# Altium PCB STM_SPI_Module.PcbDoc
Units mil, origin at the board's own origin, x right, y up, seen from the top; angles counter-clockwise.
Board outline 6000 x 4000 mil, 2 copper layers (Top Layer, Bottom Layer); 44 components, 76 nets, 295 pads, 0 vias.
Unrouted connection lines stored in the file: 101.
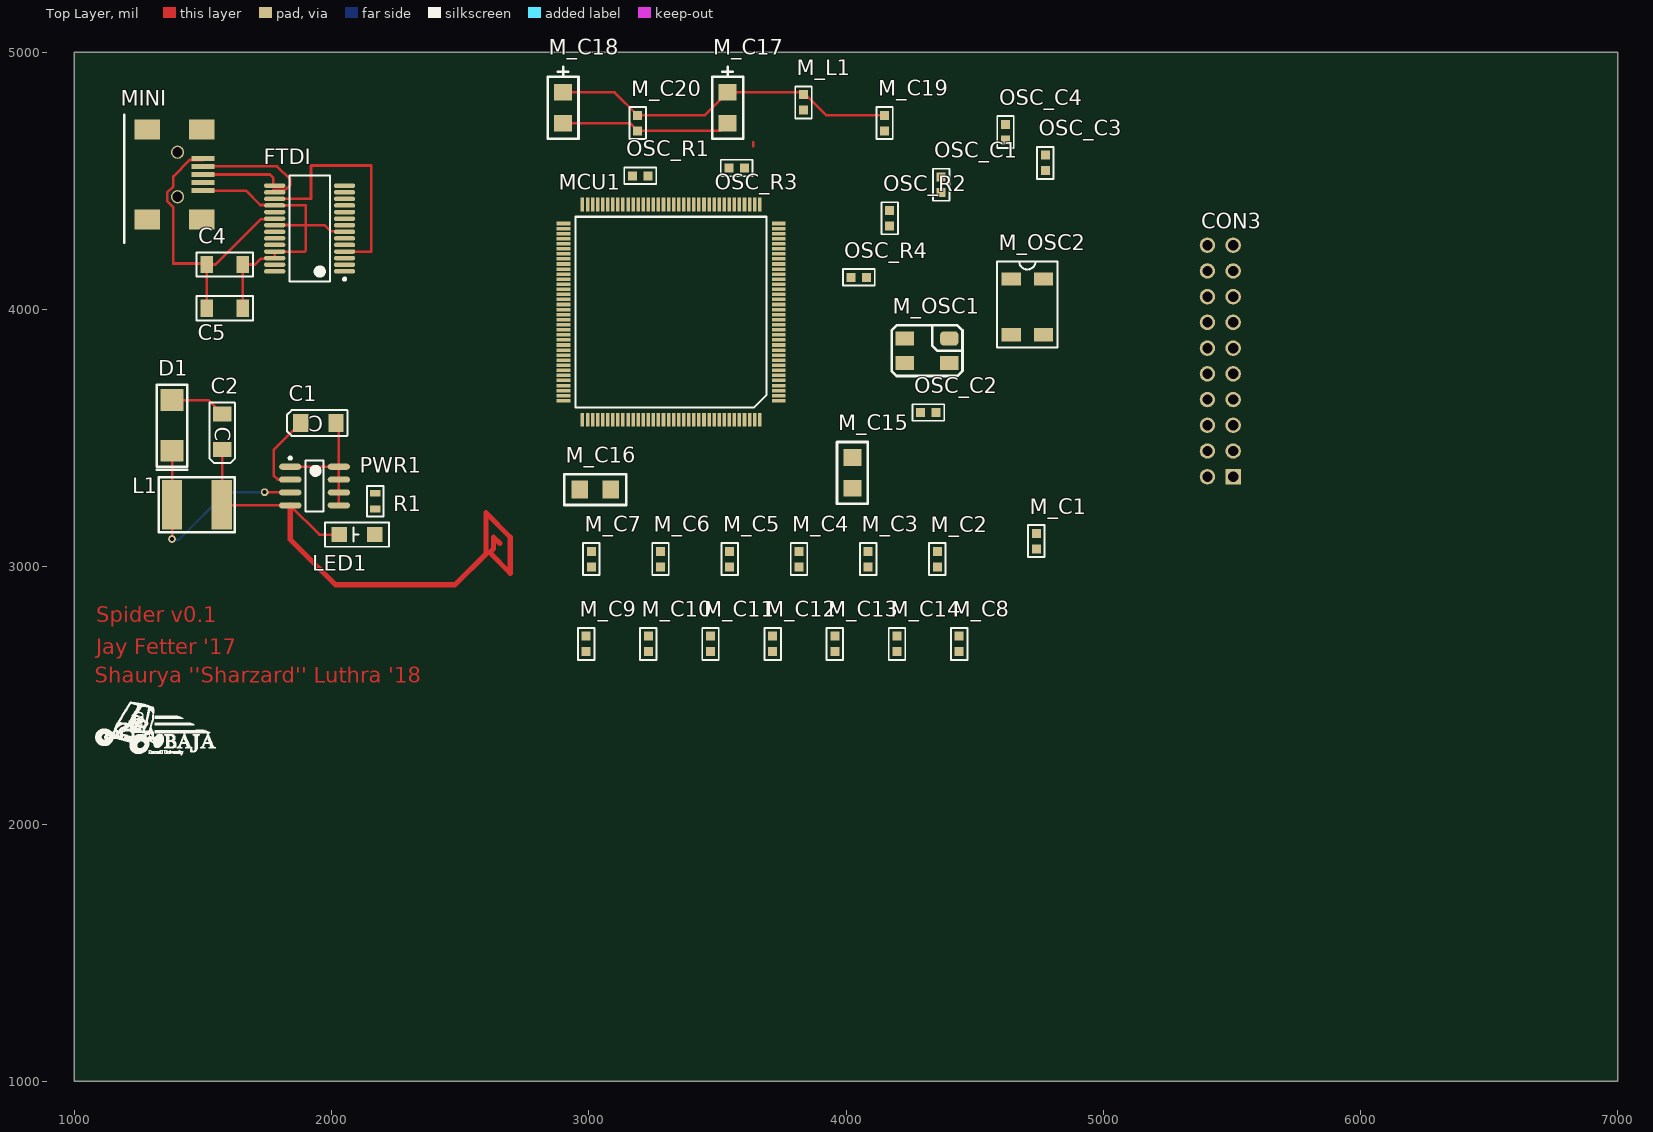
[diagram p0: Top Layer view]
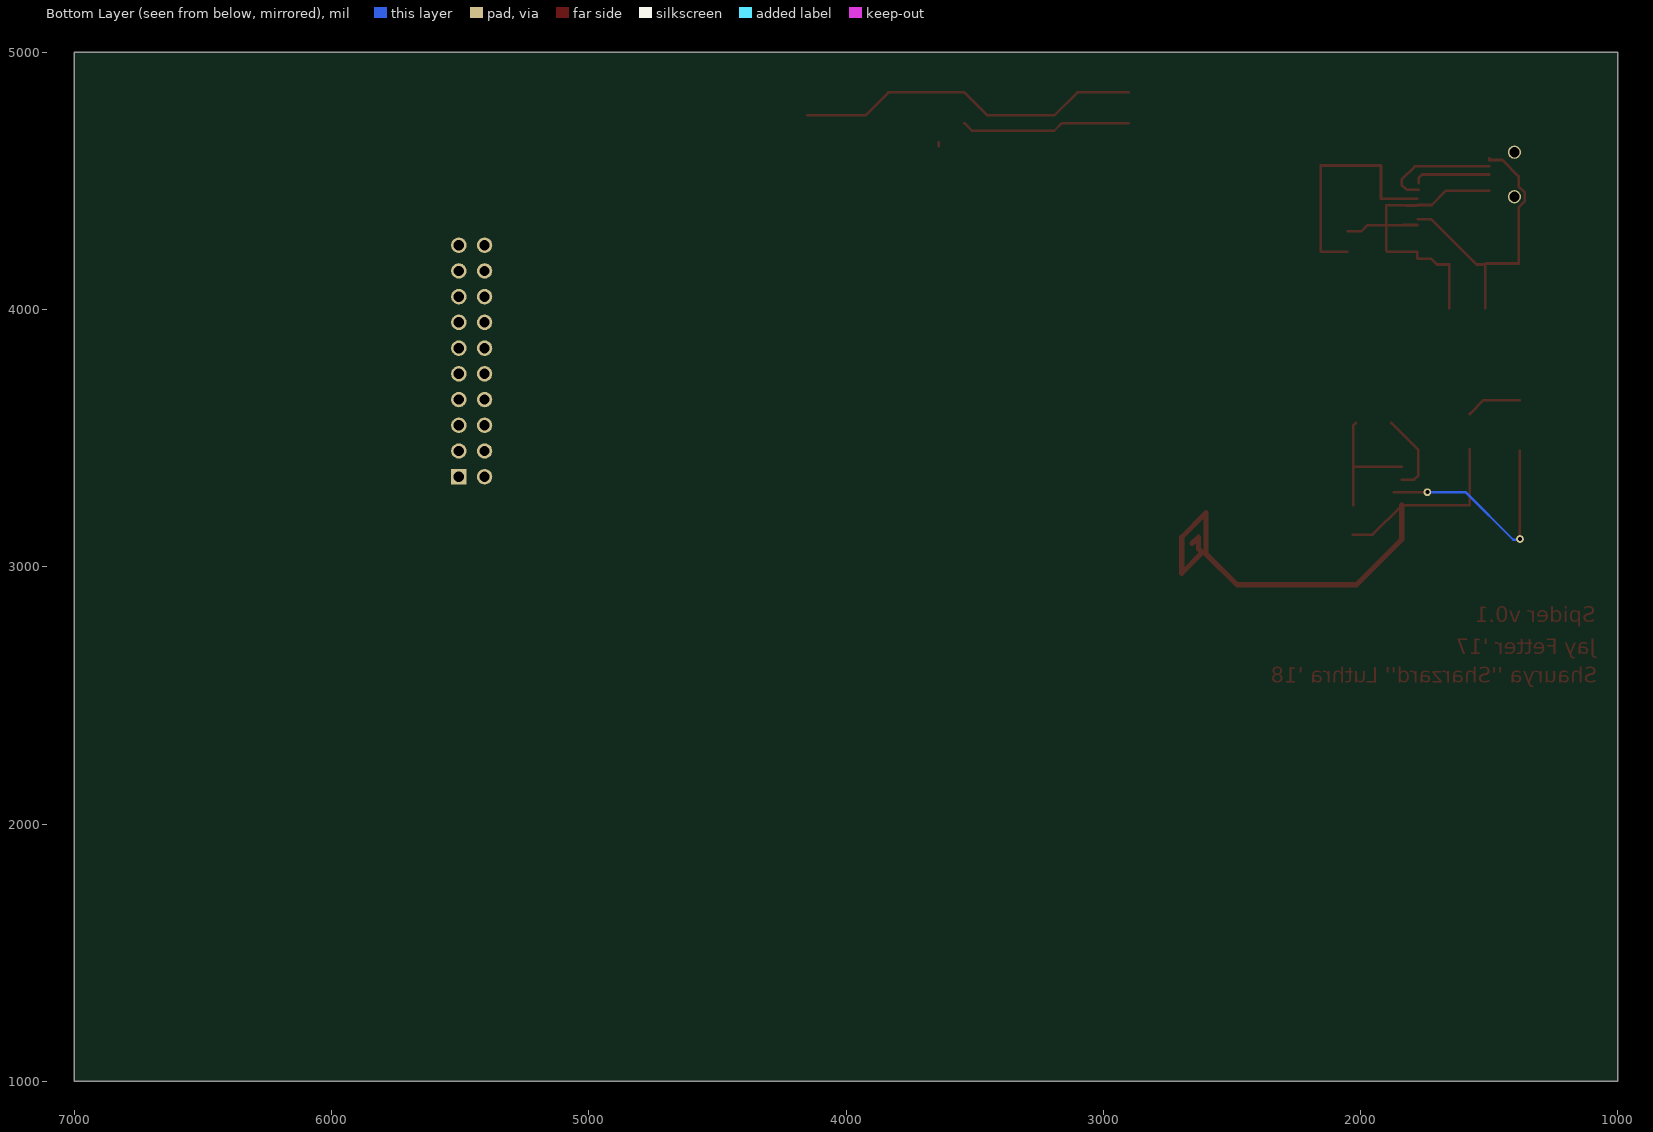
[diagram p1: Bottom Layer view, seen from below]

## Layer stack, top to bottom
Top Solder: solder mask 0.4, Solder Resist, Dk 3.5
Top Layer: signal copper 1.4
Dielectric1: dielectric 12.6, FR-4, Dk 4.8
Bottom Layer: signal copper 1.4
Bottom Solder: solder mask 0.4, Solder Resist, Dk 3.5

## Board outline
1000,1000 7000,1000 7000,5000 1000,5000

## Design rules (kind name [scope] priority, off if disabled: settings)
Clearance [All] p1: gap=10
PolygonConnect [All] p1: connectstyle=Relief reliefconductorwidth=10 reliefentries=4 polygonreliefangle="90 Angle" airgapwidth=10
RoomDefinition U_FTDI [InComponentClass('U_FTDI')] p1: confinementstyle=ConfineIn formatcopy=TRUE lockcomponents=FALSE outline 1140.83,3820 2440,3820 2440,4920 1140.83,4920
RoomDefinition Power_Supplies [InComponentClass('Power_Supplies')] p2: confinementstyle=ConfineIn formatcopy=TRUE lockcomponents=FALSE outline 1148.9,3008.9 2498.9,3008.9 2498.9,3718.9 1148.9,3718.9
RoutingVias [All] p1: holewidth=28 width=50 viastyle="Through Hole" minholewidth=28 minwidth=50 maxholewidth=28 maxwidth=50
SilkToSolderMaskClearance SilkscreenOverComponentPads [IsPad] p1: minsilkscreentomaskgap=10 clearancetoexposedcopper=TRUE
SolderMaskExpansion [All] p1: expansion=4
UnpouredPolygon [All] p1: allowunpoured=FALSE
Width [All] p1: maxlimit=20 minlimit=10 preferedwidth=10
28 further rules are at their usual default settings.

## Classes and differential pairs
component class U_FTDI: C4 C5 FTDI MINI
net class MUX[0..3]: MUX0 MUX1 MUX2 MUX3
net class DAT[0..3]: DAT0 DAT1 DAT2 DAT3
net class D[0..9]: D0 D1 D2 D3 D4 D5 D6 D7 D8 D9
component class U_SPI_Module: CON3 M_C1 M_C2 M_C3 M_C4 M_C5 M_C6 M_C7 M_C8 M_C9 M_C10 M_C11 M_C12 M_C13 M_C14 M_C15 M_C16 M_C17 M_C18 M_C19 M_C20 M_L1 M_OSC1 M_OSC2 MCU1 OSC_C1 OSC_C2 OSC_C3 OSC_C4 OSC_R1 OSC_R2 OSC_R3 OSC_R4
component class Power_Supplies: C1 C2 D1 L1 LED1 PWR1 R1

## Components (designator, comment, footprint, x,y, rotation, side; value= is the part's Value field where it differs from the comment)
C1 "15 uF Tantalum Capacitor" "1206 (POLAR)" 1948.9,3558.9 r180 top
C2 "220 uF Tantalum Capacitor" "1206 (POLAR)" 1575,3525 r270 top
C4 ".1uF Surface Mount Cap 1206" "Surface Mount Capacitor 1206" 1585,4175 r0 top
C5 "1uF" 1206 1585,4005 r0 top
CON3 "PRGM" JTAG/SWO-20PIN 5455,3800 r90 top
D1 "B260A Flyback Diode" DO-214AC 1345,3400 r90 top
FTDI "FTDI FT232R" "FTDI FT232R" 1915,4315 r180 top
L1 "ASPI-6045S" ASPI-6045 1380,3245 r90 top
LED1 "Green LED 1206" "Cathode Mark 1206 led footprint" 2030,3125 r0 top
M_C1 "Cap" SMD0603 4740,3100 r270 top
M_C2 "Cap" SMD0603 4355,3030 r270 top
M_C3 "Cap" SMD0603 4086,3030 r90 top
M_C4 "Cap" SMD0603 3817,3030 r90 top
M_C5 "Cap" SMD0603 3548,3030 r90 top
M_C6 "Cap" SMD0603 3279,3030 r90 top
M_C7 "Cap" SMD0603 3010,3030 r90 top
M_C8 "Cap" SMD0603 4440,2700 r270 top
M_C9 "Cap" SMD0603 2990,2700 r270 top
M_C10 "Cap" SMD0603 3231.67,2700 r270 top
M_C11 "Cap" SMD0603 3473.33,2700 r270 top
M_C12 "Cap" SMD0603 3715,2700 r270 top
M_C13 "Cap" SMD0603 3956.67,2700 r270 top
M_C14 "Cap" SMD0603 4198.33,2700 r270 top
M_C15 "Cap" SMD1206 4025,3365 r90 top
M_C16 "Cap" SMD1206 3025,3300 r180 top
M_C17 "Cap" "SMD1206 Polarized" 3539.75,4784.5 r270 top
M_C18 "Cap" "SMD1206 Polarized" 2900,4784.5 r270 top
M_C19 "Cap" SMD0603 4150,4725 r90 top
M_C20 "Cap" SMD0603 3190.38,4725 r270 top
M_L1 "BEAD" SMD0603 3835,4805 r90 top
M_OSC1 "8MHz Oscillator" ABMM2-OSC 4315,3840 r180 top
M_OSC2 "32.768KHz Oscillator" MC-306-OSC 4705,4010 r270 top
MCU1 "STM32F429ZIT6U" LQPF144 3320,3990 r180 top
MINI "Mini USB B" "Mini USB B" 1500,4587.95 r0 top
OSC_C1 "Cap" SMD0603 4370,4485 r270 top
OSC_C2 "Cap" SMD0603 4320,3600 r180 top
OSC_C3 "Cap" SMD0603 4775,4570 r270 top
OSC_C4 "Cap" SMD0603 4620,4690 r270 top
OSC_R1 "Res" SMD0603 3200,4520 r180 top
OSC_R2 "Res" SMD0603 4170,4355 r90 top
OSC_R3 "Res" SMD0603 3575,4550 r180 top
OSC_R4 "Res" SMD0603 4050,4125 r180 top
PWR1 "MIC4680" TJA1040 1933.9,3313.9 r0 top
R1 "0603 Res" "0603/1608 SMD Resistor" 2170,3255 r270 top

## Footprints (in the part's own frame and the unit in brackets; to place one, negate y for a bottom-side part, rotate by r counter-clockwise, add the part's x,y. Pads: shape width x height; smd on the part's side, far side on the other; paste and mask are expansions set on the pad)
"0603/1608 SMD Resistor" [mm]
  rect 0.65x1 smd: 1(0.775,0) 2(-0.775,0)
  silkscreen extent -1.5,-0.8 1.5,0.8, body extent -0.8,-0.5 0.8,0.5, height 1.2
1206 [mm]
  rect 1.25x1.7 smd: 1(-1.775,0) 2(1.775,0)
  silkscreen extent -2.8,-1.2 2.8,1.2, body extent -1.6,-0.8 1.6,0.8, height 1.2
"1206 (POLAR)" [mm]
  rect 1.5x1.8 smd: 1(1.75,0) 2(-1.75,0)
  silkscreen extent -2.87,-1.27 3.1,1.27, body extent -1.6,-0.9 1.6,0.9, height 1.2
ABMM2-OSC [mm]
  rrect50% 1.8x1.4 smd: 1(-2.2,-1.2)
  rect 1.8x1.4 smd: 2(2.2,-1.2) 3(2.2,1.2) 4(-2.2,1.2)
  silkscreen extent -3.5,-2.5 3.5,2.5
ASPI-6045 [mm]
  rect 4.9x2 smd: 1(-0.1,0) 2(-0.1,-4.9)
  silkscreen extent -2.8,-6.2 2.6,1.3, body extent -2.5,-5.5 2.3,0.5, height 4.5
"Cathode Mark 1206 led footprint" [mm] "OSRAM semiconductor"
  rect 1.5x1.5 smd: +(0,0) -(3.5,0)
  silkscreen extent -1.4,-1.2 4.9,1.2, body extent 0,-0.7 3.6,0.7, height 1
DO-214AC [mm]
  rect 2.16x2.26 smd: 1(1.3,-0.9) 2(6.3,-0.9)
  silkscreen extent -0.6,-2.4 7.8,0.6
"FTDI FT232R" [mm] "SOP, 28-Leads, Body 10.5x5.6mm (max), Pitch 0.65mm, IPC Medium Density"
  oval 2.1x0.45 smd: 1(-3.45,4.225) 2(-3.45,3.575) 3(-3.45,2.925) 4(-3.45,2.275) 5(-3.45,1.625) 6(-3.45,0.975) 7(-3.45,0.325) 8(-3.45,-0.325) 9(-3.45,-0.975) 10(-3.45,-1.625) 11(-3.45,-2.275) 12(-3.45,-2.925) 13(-3.45,-3.575) 14(-3.45,-4.225) 15(3.45,-4.225) 16(3.45,-3.575) 17(3.45,-2.925) 18(3.45,-2.275) 19(3.45,-1.625) 20(3.45,-0.975) 21(3.45,-0.325) 22(3.45,0.325) 23(3.45,0.975) 24(3.45,1.625) 25(3.45,2.275) 26(3.45,2.925) 27(3.45,3.575) 28(3.45,4.225)
  silkscreen extent -3.58,-5.25 2,5.25, body extent -2.8,-5.25 2.8,5.25, height 2
JTAG/SWO-20PIN [mil]
  rect 60x60 hole 40: 1(-450,-50)
  round 60 hole 40: 2(-450,50) 3(-350,-50) 4(-350,50) 5(-250,-50) 6(-250,50) 7(-150,-50) 8(-150,50) 9(-50,-50) 10(-50,50) 11(50,-50) 12(50,50) 13(150,-50) 14(150,50) 15(250,-50) 16(250,50) 17(350,-50) 18(350,50) 19(450,-50) 20(450,50)
LQPF144 [mm]
  rect 0.35x1.35 smd mask+0.025: 1(-8.75,-10.625) 2(-8.25,-10.625) 3(-7.75,-10.625) 4(-7.25,-10.625) 5(-6.75,-10.625) 6(-6.25,-10.625) 7(-5.75,-10.625) 8(-5.25,-10.625) 9(-4.75,-10.625) 10(-4.25,-10.625) 11(-3.75,-10.625) 12(-3.25,-10.625) 13(-2.75,-10.625) 14(-2.25,-10.625) 15(-1.75,-10.625) 16(-1.25,-10.625) 17(-0.75,-10.625) 18(-0.25,-10.625) 19(0.25,-10.625) 20(0.75,-10.625) 21(1.25,-10.625) 22(1.75,-10.625) 23(2.25,-10.625) 24(2.75,-10.625) 25(3.25,-10.625) 26(3.75,-10.625) 27(4.25,-10.625) 28(4.75,-10.625) 29(5.25,-10.625) 30(5.75,-10.625) 31(6.25,-10.625) 32(6.75,-10.625) 33(7.25,-10.625) 34(7.75,-10.625) 35(8.25,-10.625) 36(8.75,-10.625) 73(8.75,10.625) 74(8.25,10.625) 75(7.75,10.625) 76(7.25,10.625) 77(6.75,10.625) 78(6.25,10.625) 79(5.75,10.625) 80(5.25,10.625) 81(4.75,10.625) 82(4.25,10.625) 83(3.75,10.625) 84(3.25,10.625) 85(2.75,10.625) 86(2.25,10.625) 87(1.75,10.625) 88(1.25,10.625) 89(0.75,10.625) 90(0.25,10.625) 91(-0.25,10.625) 92(-0.75,10.625) 93(-1.25,10.625) 94(-1.75,10.625) 95(-2.25,10.625) 96(-2.75,10.625) 97(-3.25,10.625) 98(-3.75,10.625) 99(-4.25,10.625) 100(-4.75,10.625) 101(-5.25,10.625) 102(-5.75,10.625) 103(-6.25,10.625) 104(-6.75,10.625) 105(-7.25,10.625) 106(-7.75,10.625) 107(-8.25,10.625) 108(-8.75,10.625)
  rect 1.35x0.35 smd mask+0.025: 37(10.625,-8.75) 38(10.625,-8.25) 39(10.625,-7.75) 40(10.625,-7.25) 41(10.625,-6.75) 42(10.625,-6.25) 43(10.625,-5.75) 44(10.625,-5.25) 45(10.625,-4.75) 46(10.625,-4.25) 47(10.625,-3.75) 48(10.625,-3.25) 49(10.625,-2.75) 50(10.625,-2.25) 51(10.625,-1.75) 52(10.625,-1.25) 53(10.625,-0.75) 54(10.625,-0.25) 55(10.625,0.25) 56(10.625,0.75) 57(10.625,1.25) 58(10.625,1.75) 59(10.625,2.25) 60(10.625,2.75) 61(10.625,3.25) 62(10.625,3.75) 63(10.625,4.25) 64(10.625,4.75) 65(10.625,5.25) 66(10.625,5.75) 67(10.625,6.25) 68(10.625,6.75) 69(10.625,7.25) 70(10.625,7.75) 71(10.625,8.25) 72(10.625,8.75) 109(-10.625,8.75) 110(-10.625,8.25) 111(-10.625,7.75) 112(-10.625,7.25) 113(-10.625,6.75) 114(-10.625,6.25) 115(-10.625,5.75) 116(-10.625,5.25) 117(-10.625,4.75) 118(-10.625,4.25) 119(-10.625,3.75) 120(-10.625,3.25) 121(-10.625,2.75) 122(-10.625,2.25) 123(-10.625,1.75) 124(-10.625,1.25) 125(-10.625,0.75) 126(-10.625,0.25) 127(-10.625,-0.25) 128(-10.625,-0.75) 129(-10.625,-1.25) 130(-10.625,-1.75) 131(-10.625,-2.25) 132(-10.625,-2.75) 133(-10.625,-3.25) 134(-10.625,-3.75) 135(-10.625,-4.25) 136(-10.625,-4.75) 137(-10.625,-5.25) 138(-10.625,-5.75) 139(-10.625,-6.25) 140(-10.625,-6.75) 141(-10.625,-7.25) 142(-10.625,-7.75) 143(-10.625,-8.25) 144(-10.625,-8.75)
  silkscreen extent -9.41,-9.41 9.41,9.41
MC-306-OSC [mm]
  rect 1.3x1.9 smd: 1(-2.75,-1.6) 2(2.75,-1.6) 3(2.75,1.6) 4(-2.75,1.6)
  silkscreen extent -4.5,-3 4,3
"Mini USB B" [mm]
  rect 2.3x0.5 smd: 1(0,0) 2(0,-0.8) 3(0,-1.6) 4(0,-2.4) 5(0,-3.2)
  rect 2.5x2 smd: 6(-5.5,-6.05) 6(-5.5,2.85) 6(-0.1,-6.05) 6(-0.1,2.85)
  round 1.3 hole 1: ""(-2.5,-3.8) ""(-2.5,0.6)
  silkscreen extent -7.75,-8.35 -7.75,4.3, body extent -8.37,-6.6 0.83,3.3, height 4.14
SMD0603 [mil]
  rect 35x35 smd: 1(-30,0) 2(30,0)
  silkscreen extent -62,-32 62,32, body extent -31,-16 32,16, height 18
SMD1206 [mil]
  rect 65x70 smd: 1(-60,0) 2(60,0)
  silkscreen extent -120,-60 120,60, body extent -61,-30 61,31, height 22
"SMD1206 Polarized" [mil]
  rect 65x70 smd: 1(-60,0) 2(60,0)
  silkscreen extent -160,-60 120,60, body extent -61,-30 61,31, height 22
"Surface Mount Capacitor 1206" [mm]
  rect 1.25x1.7 smd: 1(-1.775,0) 2(1.775,0)
  silkscreen extent -2.8,-1.2 2.8,1.2, body extent -1.6,-0.8 1.6,0.8, height 1.2
TJA1040 [mm] "SOIC, 8-Leads, Body 5.0x4.0mm (max), Pitch 1.27mm, IPC Medium Density"
  oval 2.2x0.6 smd: 1(-2.4,1.905) 2(-2.4,0.635) 3(-2.4,-0.635) 4(-2.4,-1.905) 5(2.4,-1.905) 6(2.4,-0.635) 7(2.4,0.635) 8(2.4,1.905)
  silkscreen extent -2.52,-2.5 0.9,2.88, body extent -2,-2.5 2,2.5, height 1.75

## Part data
C1: "1206 Surface Mount Capacitor"
C2: library part "15 uF Tantalum Capacitor", "1206 Surface Mount Capacitor"
C4: library part ".1 uF Surface Mount Cap 1206", ".1 uF decoupling caps.  you probably want this for your project"
C5: library part "1206 CAP", ".1 uF decoupling caps.  you probably want this for your project"
CON3: library part JTAG/SWO-20PIN
L1: "68 uH 1.2A surface mount inductor"
LED1: library part "1206 Green LED", "Green surface mount LED"
M_C1 M_C2 M_C3 M_C4 M_C5 M_C6 M_C7 M_C8 M_C9 M_C10 M_C11 M_C12 M_C13 M_C14 M_C15 M_C16 M_C19 M_C20 OSC_C1 OSC_C2 OSC_C3 OSC_C4: library part "Capacitor Ceramic", "Ceramic Chip Capacitor"
M_C17 M_C18: library part "Capacitor Polarized", "Polarized Capacitor (Surface Mount)"
M_L1: library part "Chip Ferrite Bead", "Ferrite Bead"
M_OSC1: library part ABMM2-8.000MHZ-E2-T
M_OSC2: library part "MC-306 32.768K-E3", "32.7680kHz Oscillator"
OSC_R1 OSC_R2 OSC_R3 OSC_R4: library part Resistor, "Resistor"
PWR1: "3.3V Fixed Switching Regulator 1A"

## Free pads (board coordinates)
  round 30 hole 15: 0(1380,3107.8) 0(1740,3290)

## Nets (pads, with @x,y where several pads share a name; then routed paths per layer and width w, separated by ;. In a path a pad name is that pad's centre, name@x,y a point inside that pad or via, vN(x,y) a via of type N, cw(c..) or ccw(c..) an arc to the next point about the centre after c; other vN are vias at no path point)
3V3: C2.1 CON3.1 CON3.2 FTDI.4 FTDI.17 L1.2 LED1.+ M_C1.1 M_C2.1 M_C3.2 M_C4.2 M_C5.2 M_C6.2 M_C7.2 M_C8.2 M_C9.2 M_C10.2 M_C11.2 M_C12.2 M_C13.2 M_C14.2 M_L1.1 MCU1.6 MCU1.17 MCU1.30 MCU1.39 MCU1.52 MCU1.62 MCU1.72 MCU1.84 MCU1.95 MCU1.108 MCU1.121 MCU1.131 MCU1.143 MCU1.144 PWR1.4 | length 3321.2
  Top Layer w10: L1.2@1575,3245.98 C2.1 ; L1.2@1575.08,3238.9 PWR1.4 1953.31,3125 LED1.+ ; FTDI.17 1920.16,4430.16 1920.16,4559.84 2154.84,4559.84 2154.84,4300 2154.57,4299.72 2154.57,4225.43 FTDI.4
  Top Layer w20: PWR1.4 1839.41,3105.59 2015,2930 2480,2930 2600,3050 2600,3210 2695,3115 2695,2975 2615,3055 2630,3070 2630,3115 2655,3090
ADC_CS: MCU1.3
ADC_DOUT: MCU1.4
ADC_SCLK: MCU1.1
BOOT0: C1.2 C4.2 C5.2 CON3.4 CON3.6 CON3.8 CON3.10 CON3.12 CON3.14 CON3.16 CON3.18 CON3.20 FTDI.7 FTDI.18 FTDI.21 FTDI.25 FTDI.26 M_C1.2 M_C2.2 M_C3.1 M_C4.1 M_C5.1 M_C6.1 M_C7.1 M_C8.1 M_C9.1 M_C10.1 M_C11.1 M_C12.1 M_C13.1 M_C14.1 M_C15.1 M_C16.1 M_C17.2 M_C18.2 M_C19.1 M_C20.2 M_OSC1.2 M_OSC1.4 MCU1.16 MCU1.31 MCU1.38 MCU1.51 MCU1.61 MCU1.83 MCU1.94 MCU1.107 MCU1.120 MCU1.130 MCU1.138 MINI.5 OSC_C1.1 OSC_C2.1 OSC_C3.1 OSC_C4.1 PWR1.1 PWR1.5 PWR1.6 PWR1.7 PWR1.8 R1.2 | length 2602.1
  Top Layer w10: MINI.5 1667.17,4461.97 1722.84,4406.3 FTDI.18@1777.44,4406.3 ; C5.2 C4.2 1702.25,4175 1725.36,4198.11 FTDI.26@1777.44,4198.11 ; FTDI.26 FTDI.25 1895.43,4225.43 1900,4230 1900,4327.8 ; FTDI.21 1900,4327.8 ; FTDI.21@1779.17,4329.53 1832.98,4329.53 ; 1821.54,4402.83 1779.17,4402.83 FTDI.18 1899.57,4404.57 1899.57,4328.23 1900,4327.8 ; PWR1.1 PWR1.8 ; C1.2@2018.31,3559.41 C1.2 2028.39,3548.31 PWR1.8 ; PWR1.5 PWR1.6 PWR1.7 PWR1.8 ; FTDI.7@2049.09,4303.94 1997.01,4303.94 1973.16,4327.8 1900,4327.8 ; M_C18.2 3160.88,4724.5 M_C20.2 3510.25,4695 M_C17.2
CAN0RX: MCU1.139
CAN0TX: MCU1.140
CAN1RX: MCU1.135
CAN1TX: MCU1.136
CRS_DV: MCU1.43
D0: MCU1.100
D1: MCU1.41
D2: MCU1.42
D3: MCU1.81
D4: MCU1.34
D5: MCU1.96
D6: MCU1.65
D7: MCU1.66
D8: MCU1.67
D9: MCU1.68
DAT0: MCU1.98
DAT1: MCU1.99
DAT2: MCU1.111
DAT3: MCU1.112
I2C2_SCL: MCU1.11
I2C2_SDA: MCU1.10
LED_B: MCU1.87
LED_G: MCU1.57
LED_R: MCU1.56
MDC: MCU1.27
MDIO: MCU1.36
MUX0: MCU1.58
MUX1: MCU1.59
MUX2: MCU1.60
MUX3: MCU1.63
MUXEN: MCU1.2
NetC2_2: C2.2 D1.2 | length 217
  Top Layer w10: D1.2 1520.87,3648.03 C2.2
NetD1_1: D1.1 L1.1 pad.0 PWR1.3 | length 910.2
  Top Layer w10: pad.0@1380,3107.8 L1.1 ; L1.1@1380.43,3241.5 D1.1 ; pad.0@1740,3290 PWR1.3 PWR1.3@1871.1,3288.9
  Bottom Layer w10: pad.0@1380,3105 1406.1,3105 1590,3288.9 pad.0@1740,3290
NetLED1_-: LED1.- R1.1
NetM_C15_2: M_C15.2 MCU1.106
NetM_C16_2: M_C16.2 MCU1.71
NetM_C17_1: M_C17.1 M_C18.1 M_C19.2 M_C20.1 M_L1.2 MCU1.32 MCU1.33 | length 1361.2
  Top Layer w10: M_C18.1 3100.88,4844.5 M_C20.1 3450.25,4755 M_C17.1 3835,4844.5 3924.5,4755 M_C19.2
NetM_OSC1_1: M_OSC1.1 OSC_C1.2 OSC_R1.1
NetM_OSC1_3: M_OSC1.3 OSC_C2.2 OSC_R2.1
NetM_OSC2_1: M_OSC2.1 OSC_C4.2 OSC_R4.1
NetM_OSC2_4: M_OSC2.4 OSC_C3.2 OSC_R3.1
NRST: CON3.15 MCU1.25
OSCIN: MCU1.35
PC14-OSC32_IN: MCU1.8 OSC_R3.2
PC15-OSC32_OUT: MCU1.9 OSC_R4.2
PH0-OSC_IN: MCU1.23 OSC_R1.2
PH1-OSC_OUT: MCU1.24 OSC_R2.2
POWER: C4.1 C5.1 FTDI.20 MINI.1 | length 1138.2
  Top Layer w10: MINI.1 1500,4581.3 1448.51,4581.3 1385,4517.79 1385,4479.18 1360.98,4455.16 1360.98,4421.53 1385,4397.52 1385,4179.02 C4.1@1511.1,4179.02 ; C5.1 C4.1 1548.71,4175 1725.36,4351.65 FTDI.20@1777.44,4351.65
POWER_IN: C1.1 PWR1.2 | length 318.5
  Top Layer w10: PWR1.2 1791.1,3338.9 1775,3355 1775,3453.9 C1.1
RXD0: FTDI.5 MCU1.44
RXD1: MCU1.45
SD_CD: MCU1.28
SD_CLK: MCU1.113
SD_CMD: MCU1.116
SD_WP: MCU1.29
SPI5_MISO: MCU1.20
SPI5_MOSI: MCU1.21
SPI5_SCK: MCU1.19
SWCLK: CON3.9 MCU1.109
SWDIO: CON3.7 MCU1.105
SWO: CON3.13 MCU1.133
TX_EN: MCU1.70
TXD0: FTDI.1 MCU1.73
TXD1: MCU1.74
USART2_CK: MCU1.123
USART2_CTS: MCU1.117
USART2_RTS: MCU1.118
USART2_RX: MCU1.122
USART2_TX: MCU1.119
USB_D+: FTDI.15 MINI.3 | length 299.5
  Top Layer w10: MINI.3 1760.04,4524.96 1774.17,4510.83 1774.17,4491.34
USB_D-: FTDI.16 MINI.2 | length 455.1
  Top Layer w10: MINI.2 1788.54,4556.46 1840,4505 1840,4485 1820.75,4465.75 1774.17,4465.75
pads on no net: CON3.3 CON3.5 CON3.11 CON3.17 CON3.19 FTDI.2 FTDI.3 FTDI.6 FTDI.8 FTDI.9 FTDI.10 FTDI.11 FTDI.12 FTDI.13 FTDI.14 FTDI.19 FTDI.22 FTDI.23 FTDI.24 FTDI.27 FTDI.28 M_OSC2.2 M_OSC2.3 MCU1.5 MCU1.7 MCU1.12 MCU1.13 MCU1.14 MCU1.15 MCU1.18 MCU1.22 MCU1.26 MCU1.37 MCU1.40 MCU1.46 MCU1.47 MCU1.48 MCU1.49 MCU1.50 MCU1.53 MCU1.54 MCU1.55 MCU1.64 MCU1.69 MCU1.75 MCU1.76 MCU1.77 MCU1.78 MCU1.79 MCU1.80 MCU1.82 MCU1.85 MCU1.86 MCU1.88 MCU1.89 MCU1.90 MCU1.91 MCU1.92 MCU1.93 MCU1.97 MCU1.101 MCU1.102 MCU1.103 MCU1.104 MCU1.110 MCU1.114 MCU1.115 MCU1.124 MCU1.125 MCU1.126 MCU1.127 MCU1.128 MCU1.129 MCU1.132 MCU1.134 MCU1.137 MCU1.141 MCU1.142 MINI. MINI.4 MINI.6
copper on no net: | length 15
  Top Layer w10: 3640,4635 3640,4650

## Other copper
Top Layer:
  text "Spider v0.1" at 1085,2785 h60
  text "Jay Fetter '17" at 1085,2660 h60
  text "Shaurya ''Sharzard'' Luthra '18" at 1080,2550 h60

## Silkscreen, mask and mechanical layers (free items; w line width, h text height)
Top Overlay:
  drawing of 1667 lines, arcs and shapes, not listed
Top Solder:
  text "Spider v0.1" at 1085,2785 h60
  text "Jay Fetter '17" at 1085,2660 h60
  text "Shaurya ''Sharzard'' Luthra '18" at 1080,2550 h60

## Text inside footprints (layer, text, board x,y; h text height)
C1: Top Overlay "C" at 1967.9,3587.9 h60 r180
C2: Top Overlay "C" at 1546,3544 h60 r270